# Altium PCB Copy of PCB.PcbDoc (part 3 of 3)
Units mil, origin at the board's own origin, x right, y up, seen from the top; angles counter-clockwise.
Board outline 5610.24 x 866.55 mil, 2 copper layers (Top Layer, Bottom Layer), stack 62.17 mil thick; 160 components, 90 nets, 485 pads, 247 vias.
Unrouted connection lines stored in the file: 5.
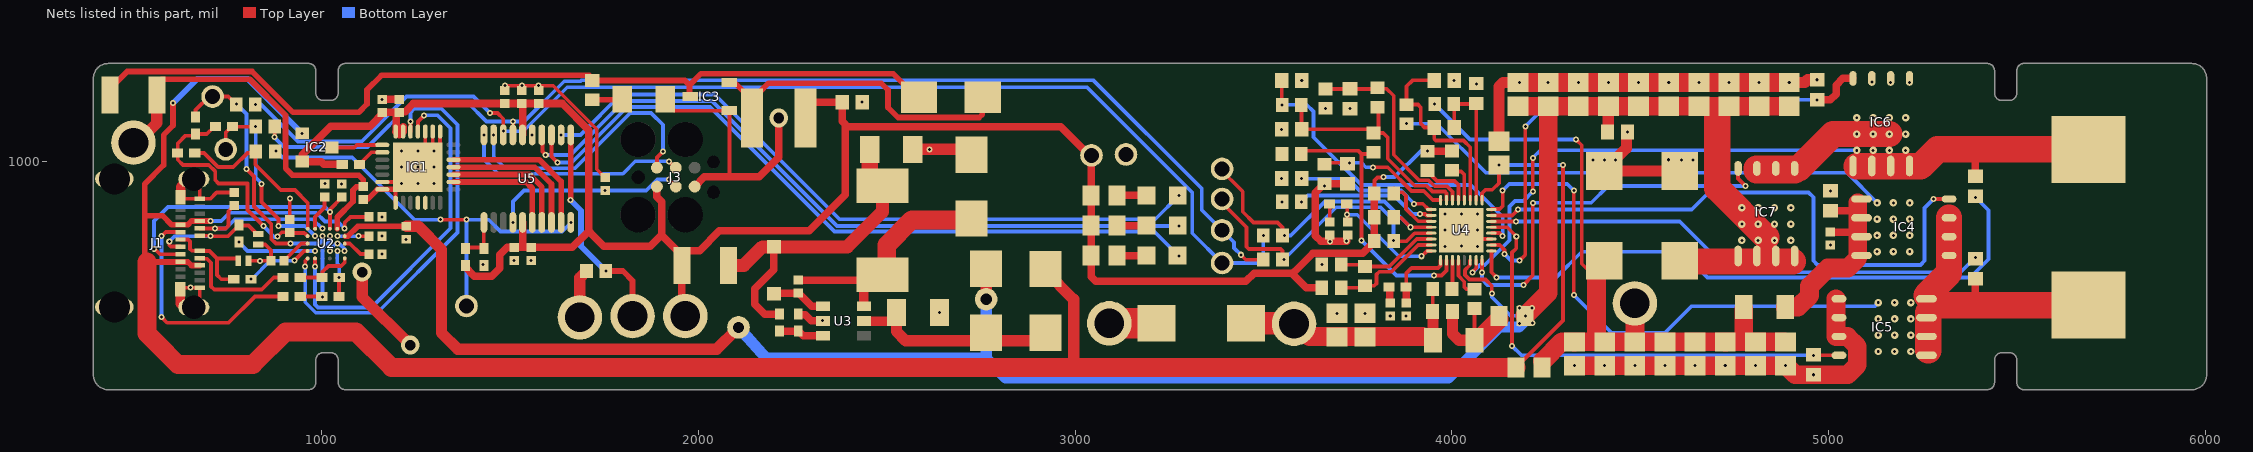
[diagram p2: the nets of this part, all layers, seen from the top]

## Part data (continued)
R60: library part RK73H1JTTD3003F, "RES 300K OHM 1% 1/10W 0603", Device Package="0603 (1608 Metric)", manufacturer="KOA Speer Electronics, Inc.", Operating Temperature="-55°C ~ 155°C", Power (Watts)="0.1W, 1/10W", Ratings=AEC-Q200, Supplier Device Package=0603, Supplier Part Number 1=2019-RK73H1JTTD3003FCT-ND, Temperature Coefficient=±100ppm/°C, Tolerance=±1%, componentlink1description=Datasheet, componentlink1url=http://www.koaspeer.com/catimages/Products/RK73H/RK73H.pdf, componentlink2description="DigiKey Link", componentlink2url=https://www.digikey.com/en/products/detail/koa-speer-electronics-inc/RK73H1JTTD3003F/9845048, Composition="Thick Film", Features="Automotive AEC-Q200, Moisture Resistant", Height - Seated (Max)="0.022\" (0.55mm)", lastupdated="14/08/2022 9:31:24 PM", Lifecycle Status=Active, Minimum Order=1, Number of Terminations=2, Package / Case="0603 (1608 Metric)", packaging=CutTape, partid=6158, Part Number=RK73H1JTTD3003F, Part Status=Active, price=0.01, Resistance="300 kOhms", series=RK73H, Size / Dimension="0.063\" L x 0.031\" W (1.60mm x 0.80mm)", Supplier 1=DigiKey
R61: library part RK73H1JTTD2004F, "RES 2M OHM 1% 1/10W 0603", Device Package="0603 (1608 Metric)", manufacturer="KOA Speer Electronics, Inc.", Operating Temperature="-55°C ~ 155°C", Power (Watts)="0.1W, 1/10W", Ratings=AEC-Q200, Supplier Device Package=0603, Supplier Part Number 1=2019-RK73H1JTTD2004FCT-ND, Temperature Coefficient=±200ppm/°C, Tolerance=±1%, componentlink1description=Datasheet, componentlink1url=http://www.koaspeer.com/catimages/Products/RK73H/RK73H.pdf, componentlink2description="DigiKey Link", componentlink2url=https://www.digikey.com/en/products/detail/koa-speer-electronics-inc/RK73H1JTTD2004F/9845151, Composition="Thick Film", Features="Automotive AEC-Q200, Moisture Resistant", Height - Seated (Max)="0.022\" (0.55mm)", lastupdated="14/08/2022 9:31:24 PM", Lifecycle Status=Active, Minimum Order=1, Number of Terminations=2, Package / Case="0603 (1608 Metric)", packaging=CutTape, partid=6175, Part Number=RK73H1JTTD2004F, Part Status=Active, price=0.01, Resistance="2 MOhms", series=RK73H, Size / Dimension="0.063\" L x 0.031\" W (1.60mm x 0.80mm)", Supplier 1=DigiKey
R63 R70 R71: library part ERJ-3EKF10R0V, "RES SMD 10 OHM 1% 1/10W 0603", Device Package="0603 (1608 Metric)", manufacturer="Panasonic Electronic Components", Operating Temperature="-55°C ~ 155°C", Power (Watts)="0.1W, 1/10W", Ratings=AEC-Q200, Supplier Device Package=0603, Supplier Part Number 1=P10.0HCT-ND, Temperature Coefficient=±100ppm/°C, Tolerance=±1%, componentlink1description=Datasheet, componentlink1url=https://industrial.panasonic.com/cdbs/www-data/pdf/RDA0000/AOA0000C304.pdf, componentlink2description="DigiKey Link", componentlink2url=https://www.digikey.com/en/products/detail/panasonic-electronic-components/ERJ-3EKF10R0V/196065, Composition="Thick Film", Features="Automotive AEC-Q200", Height - Seated (Max)="0.022\" (0.55mm)", lastupdated="14/08/2022 9:31:25 PM", Lifecycle Status=Active, Minimum Order=1, Number of Terminations=2, Package / Case="0603 (1608 Metric)", packaging=TapeAndReel, partid=5647, Part Number=ERJ-3EKF10R0V, Part Status=Active, price=0.01, Resistance="10 Ohms", series=ERJ-3EK, Size / Dimension="0.063\" L x 0.031\" W (1.60mm x 0.80mm)", Supplier 1=DigiKey
R64: library part RK73H1JTTD3833F, "RES 383K OHM 1% 1/10W 0603", Device Package="0603 (1608 Metric)", manufacturer="KOA Speer Electronics, Inc.", Operating Temperature="-55°C ~ 155°C", Power (Watts)="0.1W, 1/10W", Ratings=AEC-Q200, Supplier Device Package=0603, Supplier Part Number 1=2019-RK73H1JTTD3833FCT-ND, Temperature Coefficient=±100ppm/°C, Tolerance=±1%, componentlink1description=Datasheet, componentlink1url=http://www.koaspeer.com/catimages/Products/RK73H/RK73H.pdf, componentlink2description="DigiKey Link", componentlink2url=https://www.digikey.com/en/products/detail/koa-speer-electronics-inc/RK73H1JTTD3833F/9845250, Composition="Thick Film", Features="Automotive AEC-Q200, Moisture Resistant", Height - Seated (Max)="0.022\" (0.55mm)", lastupdated="14/08/2022 9:31:18 PM", Lifecycle Status=Active, Minimum Order=1, Number of Terminations=2, Package / Case="0603 (1608 Metric)", packaging=CutTape, partid=8746, Part Number=RK73H1JTTD3833F, Part Status=Active, price=0.01, Resistance="383 kOhms", series=RK73H, Size / Dimension="0.063\" L x 0.031\" W (1.60mm x 0.80mm)", Supplier 1=DigiKey
R65: library part AC0603FR-0730K1L, "RES SMD 30.1K OHM 1% 1/10W 0603", Device Package="0603 (1608 Metric)", manufacturer=Yageo, Operating Temperature="-55°C ~ 155°C", Power (Watts)="0.1W, 1/10W", Ratings=AEC-Q200, Supplier Device Package=0603, Supplier Part Number 1=YAG5332CT-ND, Temperature Coefficient=±100ppm/°C, Tolerance=±1%, componentlink1description=Datasheet, componentlink1url=https://www.yageo.com/upload/media/product/productsearch/datasheet/rchip/PYu-AC_51_RoHS_L_7.pdf, componentlink2description="DigiKey Link", componentlink2url=https://www.digikey.com/en/products/detail/yageo/AC0603FR-0730K1L/5896023, Composition="Thick Film", Features="Automotive AEC-Q200, Moisture Resistant", Height - Seated (Max)="0.022\" (0.55mm)", lastupdated="14/08/2022 9:31:19 PM", Lifecycle Status=Active, Minimum Order=1, Number of Terminations=2, Package / Case="0603 (1608 Metric)", packaging=CutTape, partid=8360, Part Number=AC0603FR-0730K1L, Part Status=Active, price=0.01, Resistance="30.1 kOhms", series=AC, Size / Dimension="0.063\" L x 0.031\" W (1.60mm x 0.80mm)", Supplier 1=DigiKey
R66: library part RC0603FR-07191KL, "RES 191K OHM 1% 1/10W 0603", Device Package="0603 (1608 Metric)", manufacturer=Yageo, Operating Temperature="-55°C ~ 155°C", Power (Watts)="0.1W, 1/10W", Supplier Device Package=0603, Supplier Part Number 1=311-191KHRCT-ND, Temperature Coefficient=±100ppm/°C, Tolerance=±1%, componentlink1description=Datasheet, componentlink1url=https://www.yageo.com/upload/media/product/productsearch/datasheet/rchip/PYu-RC_Group_51_RoHS_L_10.pdf, componentlink2description="DigiKey Link", componentlink2url=https://www.digikey.com/en/products/detail/yageo/RC0603FR-07191KL/727005, Composition="Thick Film", Features="Moisture Resistant", Height - Seated (Max)="0.022\" (0.55mm)", lastupdated="14/08/2022 9:31:20 PM", Lifecycle Status=Active, Minimum Order=1, Number of Terminations=2, Package / Case="0603 (1608 Metric)", packaging=CutTape, partid=7764, Part Number=RC0603FR-07191KL, Part Status=Active, price=0.01, Resistance="191 kOhms", series=RC_L, Size / Dimension="0.063\" L x 0.031\" W (1.60mm x 0.80mm)", Supplier 1=DigiKey
R67: library part RMCF0603JT220K, "RES 220K OHM 5% 1/10W 0603", Device Package="0603 (1608 Metric)", manufacturer="Stackpole Electronics Inc", Operating Temperature="-55°C ~ 155°C", Power (Watts)="0.1W, 1/10W", Ratings=AEC-Q200, Supplier Device Package=0603, Supplier Part Number 1=RMCF0603JT220KCT-ND, Temperature Coefficient=±200ppm/°C, Tolerance=±5%, componentlink1description=Datasheet, componentlink1url=https://www.seielect.com/catalog/sei-rmcf_rmcp.pdf, componentlink2description="DigiKey Link", componentlink2url=https://www.digikey.com/en/products/detail/stackpole-electronics-inc/RMCF0603JT220K/1758071, Composition="Thick Film", Features="Automotive AEC-Q200", Height - Seated (Max)="0.022\" (0.55mm)", lastupdated="14/08/2022 9:31:25 PM", Lifecycle Status=Active, Minimum Order=1, Number of Terminations=2, Package / Case="0603 (1608 Metric)", packaging=CutTape, partid=5861, Part Number=RMCF0603JT220K, Part Status=Active, price=0.01, Resistance="220 kOhms", series=RMCF, Size / Dimension="0.061\" L x 0.031\" W (1.55mm x 0.80mm)", Supplier 1=DigiKey
R68 R72: library part CRCW08050000Z0EAHP, "RES SMD 0 OHM JUMPER 1/2W 0805", Device Package="0805 (2012 Metric)", manufacturer="Vishay Dale", Operating Temperature="-55°C ~ 155°C", Power (Watts)="0.5W, 1/2W", Ratings=AEC-Q200, Supplier Device Package=0805, Supplier Part Number 1=541-0.0TBCT-ND, Tolerance=Jumper, componentlink1description=Datasheet, componentlink1url=http://www.vishay.com/docs/20043/crcwhpe3.pdf, componentlink2description="DigiKey Link", componentlink2url=https://www.digikey.com/en/products/detail/vishay-dale/CRCW08050000Z0EAHP/2222316, Composition="Thick Film", Features="Automotive AEC-Q200, Pulse Withstanding", Height - Seated (Max)="0.020\" (0.50mm)", lastupdated="14/08/2022 9:45:08 PM", Lifecycle Status=Active, Minimum Order=1, Number of Terminations=2, Package / Case="0805 (2012 Metric)", packaging=TapeAndReel, partid=28039, Part Number=CRCW08050000Z0EAHP, Part Status=Active, price=0.02, Resistance="0 Ohms", series=CRCW-HP, Size / Dimension="0.079\" L x 0.049\" W (2.00mm x 1.25mm)", Supplier 1=DigiKey
R69 R73: library part PMR18EZPJU5L0, "RES 0.005 OHM 5% 1W 1206", Device Package="1206 (3216 Metric)", manufacturer="Rohm Semiconductor", Operating Temperature="-55°C ~ 155°C", Power (Watts)=1W, Ratings=AEC-Q200, Supplier Device Package=1206, Supplier Part Number 1=RHM.005AMCT-ND, Temperature Coefficient=±100ppm/°C, Tolerance=±5%, componentlink1description=Datasheet, componentlink1url=https://www.rohm.com/datasheet/PMR18EZPFV/pmr-e, componentlink2description="DigiKey Link", componentlink2url=https://www.digikey.com/en/products/detail/rohm-semiconductor/PMR18EZPJU5L0/2094212, Composition="Metal Element", Features="Automotive AEC-Q200, Current Sense", Height - Seated (Max)="0.017\" (0.43mm)", lastupdated="14/08/2022 9:38:16 PM", Lifecycle Status=Active, Minimum Order=1, Number of Terminations=2, Package / Case="1206 (3216 Metric)", packaging=TapeAndReel, partid=27011, Part Number=PMR18EZPJU5L0, Part Status=Active, price=0.11, Resistance="5 mOhms", series=PMR, Size / Dimension="0.126\" L x 0.063\" W (3.20mm x 1.60mm)", Supplier 1=DigiKey
R74 R75: library part RC0603FR-074R99L, "RES 4.99 OHM 1% 1/10W 0603", Device Package="0603 (1608 Metric)", manufacturer=Yageo, Operating Temperature="-55°C ~ 155°C", Power (Watts)="0.1W, 1/10W", Supplier Device Package=0603, Supplier Part Number 1=311-4.99HRCT-ND, Temperature Coefficient=±200ppm/°C, Tolerance=±1%, componentlink1description=Datasheet, componentlink1url=https://www.yageo.com/upload/media/product/productsearch/datasheet/rchip/PYu-RC_Group_51_RoHS_L_10.pdf, componentlink2description="DigiKey Link", componentlink2url=https://www.digikey.com/en/products/detail/yageo/RC0603FR-074R99L/727218, Composition="Thick Film", Features="Moisture Resistant", Height - Seated (Max)="0.022\" (0.55mm)", lastupdated="14/08/2022 9:31:08 PM", Lifecycle Status=Active, Minimum Order=1, Number of Terminations=2, Package / Case="0603 (1608 Metric)", packaging=TapeAndReel, partid=12919, Part Number=RC0603FR-074R99L, Part Status=Active, price=0.01, Resistance="4.99 Ohms", series=RC_L, Size / Dimension="0.063\" L x 0.031\" W (1.60mm x 0.80mm)", Supplier 1=DigiKey
U2: "Standalone USB Type-C and USB Power Delivery Controller"
U3: "RICHTEK 1.2A, 24V, 700kHz Step-Down Converter SOT23-6"
U4: "I2C 1- to 5-Cell Buck-Boost Battery Charge Controller with USB-C PD 3.0 OTG Output"
U5: "Value-line Arm-based 32-bit MCU with up to 256 KB Flash, timers, ADC, communication interfaces, 2.4-3.6 V operation - TSSOP20 20-pin"

## Free pads (board coordinates)
  round 60 hole 30: 2(2106.3,559.06) 2(2763.78,633.86)

## Via types
v1: diameter 16, hole 8, Top Layer to Bottom Layer, tented bottom, 156 vias
v2: diameter 19.68, hole 7.87, Top Layer to Bottom Layer, tented top, 48 vias
v3: diameter 16, hole 8, Top Layer to Bottom Layer, tented both sides, 30 vias
v4: diameter 19.68, hole 7.87, Top Layer to Bottom Layer, 10 vias
v5: diameter 50, hole 28, Top Layer to Bottom Layer, tented both sides, 3 vias

## Nets (pads, with @x,y where several pads share a name; then routed paths per layer and width w, separated by ;. In a path a pad name is that pad's centre, name@x,y a point inside that pad or via, vN(x,y) a via of type N, cw(c..) or ccw(c..) an arc to the next point about the centre after c; other vN are vias at no path point)
+3V3: C14.2 C24.2 C25.2 C26.2 C27.2 C28.2 C29.2 C30.2 IC1.6 IC1.7 IC2.2 J3.1 J4.1 J12.1 L2.1 R24.1 R25.2 R26.2 R27.2 R30.1 R42.2 R50.2 R51.2 R52.2 R53.2 R54.2 R62.1 U5.5 U5.16 | length 5570
  Top Layer w10: R54.2@3794.41,915 3794.41,948.82 3802.55,956.96 3817.75,956.96 v1(3818.9,958.11)
  Top Layer w20: R30.1@1054.36,992 1005.23,992 998,999.23 948,999.23 948,1017 1024,1093 1128,1093 1164.88,1129.88 C25.2@1204.25,1129.88 ; IC1.7@1195.98,1079.01 1197.76,1080.79 1197.76,1123.39 C25.2@1204.25,1129.88 ; 1205.04,1070.87 1205.04,1079.01 ; IC1.6@1215.67,1079.01 IC1.6@1215.67,1091.32 ; R24.1@1379.09,720.91 1405,695 1451,695 1472.44,716.44 1472.44,751.97 1491.81,771.34 C30.2@1510.75,771.34 1511.04,771.63 1532.95,771.63 ; U5.5@1532.95,837.87 1532.95,771.63 ; U5.16@1532.95,1070.16 C27.2@1532.95,1152 ; 1712.6,811.02 1748.86,774.76 1872.13,774.76 1903.01,805.65 ; J3.1@1889.76,933.11 1889.76,906.14 1903.01,892.89 1903.01,805.65 ; J4.1@1965,589.21 1956,598.21 R42.2@1956,723.78 R42.2@1956,750.35 ; L2.1@2298.34,1157 C14.2@2381.43,1157 2381.43,1106.85 2389.76,1098.52 2389.76,1086.61 2389.81,1086.57 2389.81,910.81 2294.24,815.24 2055.24,815.24 2002.99,762.99 1968.64,762.99 R42.2@1956,750.35 ; 2396.82,1092.24 2961.88,1092.24 3043.31,1010.81 3043.31,909.61 3043.31,829.53 3043.31,749.53 3043.31,693.04 3055.11,681.24 3453.36,681.24 3475.43,703.31 3574.69,703.31 3613.73,664.27 R62.1@3654.41,664.27 ; 3581.2,706.2 3631.42,756.42 3763.99,756.42 R52.2@3782.55,774.97 ; R52.2@3794.41,788.11 R53.2@3794.41,851.48 R54.2@3794.41,915 ; R50.2@3935.52,1026.81 3935.82,1027.1 4000.22,1027.1 R51.2@4000.52,1027.4 ; C25.2@1204.25,1129.88 C25.2@1205.04,1129.88 1206.85,1131.69 1221.21,1131.69 1243.06,1153.54 1485.47,1153.54 1532.95,1153.54 1575.47,1153.54 1637.75,1153.54 1708.66,1082.64 1708.66,814.96 1665.04,771.34 C29.2@1555.75,771.34 1533.25,771.34 1532.95,771.63 ; 1903.01,805.65 1903.01,803.34 R42.2@1956,750.35
  Bottom Layer w10: v1(3818.9,958.11) 3848.11,958.11 3917.83,1027.83 v1(3935,1027.83)
+5V0: C13.2 J2.1 R20.2 U2.A5 | length 1078.1
  Top Layer w15: J2.1@500,1049.56 J2.1@509.56,1049.56 ; R20.2@562.01,1150 R20.2@562.01,1172 ; R20.2@565,1188 565,1208.58 574.42,1218 808.55,1218 903.8,1122.75 903.8,1049.99 904.22,1049.56 904.22,980.78 921.61,963.39 1097.61,963.39 1110.24,950.76 C13.2@1110.24,933.66 ; U2.A5@1041.1,821.06 1041.1,851.53 1082.68,893.11 1082.68,923.34 1091.86,932.53 C13.2@1103.35,932.53
  Top Layer w30: J2.1@509.56,1049.56 562.01,1102.01 R20.2@562.01,1150
GND: C8.1 C9.1 C10.1 C11.1 C12.1 C13.1 C14.1 C15.1 C16.2 C18.1 C19.2 C24.1 C25.1 C26.1 C27.1 C28.1 C29.1 C30.1 C31.1 C32.1 C33.1 C34.1 C35.1 C36.1 C37.1 C38.1 C39.1 C40.1 C41.1 C42.1 C43.1 C44.1 C45.1 C46.2 C47.1 C49.1 C50.1 C51.1 C52.1 C53.1 C54.1 C55.1 C56.1 C57.2 C58.1 C59.1 C63.1 C64.1 C65.1 C66.1 C67.1 C68.1 C69.1 C70.1 C71.1 C72.1 C73.1 C74.1 C75.1 C76.1 C77.1 C78.2 D3.2 D4.1 D8.2 IC1.1 IC1.2 IC1.3 IC1.13 IC1.14 IC1.15 IC1.29 IC3.1 IC5.1 IC5.2 IC5.3 IC6.1 IC6.2 IC6.3 J1.A1 J1.A12 J1.B1 J1.B12 J1.S J3.5 J5.1 J15.1 J18.1 R21.1 R28.1 R29.1 R58.2 R60.2 R65.1 R66.1 R67.1 U2.C5 U2.D4 U2.D6 U3.2 U4.27 U4.33 U5.15 | length 5845.5
  Top Layer w10: J1.B1@624.61,660.54 628.54,664.47 J1.A12@676.18,664.47 676.18,612.5 J1.S@660.04,612.5 ; J1.B12@625,904.63 628.94,900.69 J1.A1@676.18,900.69 ; J1.S@660.04,952.66 676.18,952.66 J1.A1@676.18,900.69 ; C32.1@767.33,916.96 720.79,916.96 704.53,900.69 J1.A1@676.18,900.69 ; D3.2@805.78,736 v3(835.41,736) 865.04,736 C11.1@865.04,736.34 865.04,763.96 849.74,779.26 D8.2@831,779.26 ; C12.1@910,850.32 C12.1@915,845.32 v1(915,901.34) ; C10.1@1007.36,940.08 v1(1007.87,940.59) ; C8.1@1158.35,755 v1(1159.69,753.66) ; v1(1159.69,801.38) C9.1@1159.78,801.28 ; IC1.13@1160.55,945.16 1207.8,945.16 v4(1211.73,941.22) 1195.98,925.47 IC1.15@1195.98,890.04 ; v4(1255.04,984.53) IC1.29@1274.72,1004.21 ; IC1.3@1274.72,1079.01 IC1.29@1274.72,1004.21 ; IC1.2@1294.41,1079.01 IC1.29@1294.41,1023.9 ; IC1.1@1314.09,1079.01 1314.09,1043.58 v4(1298.35,1027.83) IC1.29@1294.41,1023.9 ; v1(1486.83,1200.79) v1(1531.5,1200.79) v1(1574.8,1200.79) 1614.55,1200.79 1730,1085.34 1730,979.05 C31.1@1751.97,957.09 ; C16.2@1912.09,1168 C16.2@1912.09,1165 1912.09,1159.16 1936.65,1134.6 IC3.1@2082.17,1134.6 2082.17,959.83 2083,959 ; 2213,1087.17 v5(2213,1115) ; U4.33@4006.43,817.13 4006.43,809.32 4017.47,798.28 4025.28,798.28 4030.06,793.5 U4.27@4105,793.5 ; IC1.29@1274.72,1004.21 IC1.29@1294.41,1023.9
  Top Layer w15: C13.1@1110.24,899.01 1121.01,899.01 1147.47,925.47 IC1.14@1160.55,925.47 IC1.29@1195.98,925.47
  Top Layer w20: v1(1160.04,1164.53) C25.1@1205.04,1164.53 ; J3.5@1989.76,933.11 2015.66,959 2083,959 2161,959 2213,1011 2213,1087.17 ; R21.1@2265,595.16 2265,592.2 2283.58,592.2 2298.79,577 v1(2329,577) ; v1(3661.42,934.49) 3661.12,934.49 3658.6,937.01 R66.1@3661.59,940 ; v1(3720.47,788.11) 3677.88,788.11 v1(3677.17,787.4) 3652.66,787.4 3637.8,802.27 3637.8,917.03 R66.1@3661.59,940.83 3661.79,940.63 3723.19,940.63 C42.1@3723.39,940.43
  Top Layer w25: J1.B1@624.61,660.54 624.61,621.9 634,612.5 J1.S@660.04,612.5 ; J1.B12@625,904.63 625,932.35 645.31,952.66 J1.S@660.04,952.66
  Top Layer w30: v5@1112.75,706.17 1112.57,706 v5(1107,706) 1107,640 v5(1235,512) ; J15.1@1685.04,612.2 1685.04,690.94 R29.1@1702.76,708.66 ; C19.2@2568.9,1031.5 2569.09,1031.69 v1(2613,1031.69) 2710.43,1031.69 D4.1@2724.41,1017.72 ; C47.1@4125,1052.99 4125,1198.3 4135.74,1209.04 C77.1@4175.91,1209.04 ; v1(4466.57,1077.52) 4463.86,1074.8 4463.86,1034.92 4405,976.06 C57.2@4405,974.09 C78.2@4605,974.09 ; v1(4895.8,1209.15) 4937.31,1209.15 4944.74,1216.57 v1(4970,1216.57)
  Top Layer w50: C77.1@4175.91,1209.04 4176.01,1209.15 v1(4180,1209.15) v1(4895.8,1209.15) C68.1@4895.91,1209.25 C68.1@4896.5,1209.84 ; v1(4325.91,457.46) v1(4405.91,457.46) v1(4485.91,457.46) v1(4565.91,457.46) v1(4645.91,457.46) v1(4725.91,457.46) v1(4805.91,457.46) v1(4885.91,457.46) 4887.87,457.46 4911.91,433.43 v1(4960,433.43) 5050.97,433.43 5076.48,458.94 5076.48,508.52 5050.08,534.92 5020,534.92 IC5.1@5020,635
  Top Layer w80: J18.1@3090.55,570 C46.2@3215.55,570
  Bottom Layer w10: v1(1021.42,762.01) 1022.57,763.15 1022.57,767.2 1035.91,780.54 1039.95,780.54 v1(1041.1,781.69) ; v1@1046.02,781.69 1060.79,766.93 v1(1060.79,762.01)
  other v1: 3836.54,589.21 3878.38,589.21 3695,596.5 3769.41,596.5 2639.76,598.43 652,665 1427.91,725.98 3655,725.72 1510.75,736.69 1555.75,736.69 5004.77,777.68 1224,792 1159.69,852.49 3549.41,892.6 5005,921.57 1052.36,940.08 3548.43,954.25 4375,1003.54 4405.91,1003.54 4435,1003.54 4575,1004.21 4610,1003.54 4640,1003.54 1558.54,1070.16 3548.43,1085 3730,1139.8 3665,1140.78 2434.57,1157 4065,1205 4255.91,1209.04 4335.91,1209.04 4415.91,1209.04 4495.91,1209.04 4575.91,1209.04 4655.91,1209.25 4735.91,1209.25 4815.91,1209.25 5115,1210 5165,1209.84 5215,1209.84 3601.57,1215 4006.25,1215.01
  other v4: 4025.28,817.13 1255.04,941.22 1298.35,941.22 1211.73,984.53 1298.35,984.53 1211.73,1027.83 1255.04,1027.83
NetC8_2: C8.2 U2.C6 | length 75.9
  Top Layer w10: U2.C6@1060.79,781.69 1074.33,781.69 1102.36,753.66 C8.2@1125.04,753.66
NetC9_2: C9.2 U2.B5 | length 85.8
  Top Layer w10: v3(1097.36,801.38) C9.2@1125.04,801.38
  Bottom Layer w10: v1(1041.1,801.38) v3(1097.36,801.38) v3@1096.05,802.69
NetC10_2: C10.2 U2.A2 | length 90.5
  Top Layer w10: U2.A2@982.06,821.08 982.06,852.14 1007.36,877.44 C10.2@1007.36,901.06
NetC11_2: C11.2 U2.C1 | length 81.3
  Top Layer w10: C11.2@899.93,736.09 945.54,781.69 U2.C1@962.36,781.69
NetC12_2: C12.2 R11.1 R12.1 R13.2 U2.B1 | length 649.3
  Top Layer w10: R11.1@717.36,1092 714.41,1092 694.77,1072.36 R12.1@665,1072.36 660.83,1068.19 638.19,1068.19 617.36,1047.36 R13.2@617.36,1022.42 617.36,1004.21 631.57,990 700,990 717.36,972.64 717.36,950 725.98,941.39 802.55,941.39 802.55,870.56 v3(845,828.11) ; v3(882.95,800.87) 893.74,811.66 C12.2@915,811.66 ; C12.2@915,810 953.46,810 956.51,806.94 956.73,806.94 962.3,801.38 U2.B1@962.36,801.38
  Bottom Layer w10: v3(845,828.11) 873.9,799.21 v3@877.95,799.21
NetC15_2: C15.2 D9.2 D10.2 U3.5 | length 560
  Top Layer w10: C15.2@2505,576 2525.59,596.59 C15.2@2525.59,598.43 ; D10.2@2899.88,523.62 D10.2@2921.26,545
  Top Layer w25: U3.5@2439.13,576 C15.2@2505,576
  Top Layer w30: C15.2@2525.59,596.59 2525.59,547.99 2549.96,523.62 D10.2@2899.88,523.62
NetC16_1: C16.1 R18.1 | length 82.2
  Top Layer w15: R18.1@1718,1163.41 1792.32,1163.41 C16.1@1797.91,1169
NetC17_1: C17.1 D4.2 L1.1 U3.6 | length 649.1
  Top Layer w20: C17.1@2265,684.84 L1.1@2457.83,684.84 ; L1.1@2443,670 L1.1@2457.83,684.84 ; L1.1@2500,703.31 2476.3,703.31 L1.1@2457.83,684.84
  Top Layer w25: U3.6@2435.12,614.94 U3.6@2435.12,615.37 ; U3.6@2439.13,615.37 2439.13,670 L1.1@2443,670
  Top Layer w50: L1.1@2500,703.31 2500,777.76 2566.73,844.49 D4.2@2724.41,844.49
NetC17_2: C17.2 D2.2 U3.1 | length 145.9
  Top Layer w20: D2.2@2200,648.78 2200.71,649.49 2264.29,649.49 C17.2@2265,650.2 2265.79,650.2 2300.61,615.37 U3.1@2330.87,615.37
NetC18_2: C18.2 R55.2 U4.16 | length 342.7
  Top Layer w10: R55.2@3721.03,886.97 3722.21,885.79 v1(3722.21,858.27) ; C18.2@3723.39,838.97 C18.2@3722.8,839.56 ; v1(3920,748.03) 3933.98,762.01 U4.16@3945.55,762.01 ; v1(3722.21,858.27) 3722.21,840.15 C18.2@3722.8,839.56 ; v1(3722.21,858.27) 3722.8,857.68 C18.2@3722.8,839.56
  Bottom Layer w10: v1(3722.21,858.27) 3748.9,858.27 3859.13,748.03 v1(3920,748.03)
NetC19_1: C19.1 D2.1 L1.2 R19.2 R42.1 | length 895
  Top Layer w10: L1.2@2454.72,968.7 L1.2@2488.19,935.24
  Top Layer w20: D2.1@2200,772.79 2200,712 2150,662 2150,620.79 2176.38,594.41 R19.2@2215,594.41
  Top Layer w35: R42.1@2080.02,723.78 2120.78,723.78 2169.79,772.79 D2.1@2200,772.79 2394.84,772.79 2488.19,866.14 L1.2@2488.19,935.24
  Top Layer w45: L1.2@2454.72,968.7 C19.1@2454.72,1031.5
NetC31_2: C31.2 J3.3 U5.4 | length 519.6
  Top Layer w10: v3(1921.26,951.57) J3.3@1939.74,933.11
  Bottom Layer w10: v1(1507.36,837.87) 1507.36,893.19 1536.61,922.44 v3(1751.97,922.44) ; v3@1751.97,922.32 1861.24,922.32 1890.49,951.57 v3(1921.26,951.57)
NetC32_2: C32.2 J1.A5 U2.A3 | length 444.7
  Top Layer w10: J1.A5@676.18,821.95 v3(716.47,821.95) 744.92,821.95 752.36,829.39 752.36,867.28 C32.2@767.36,882.28
  Bottom Layer w10: v3@715.83,820.87 v3@716.07,821.1 ; v3(716.47,821.95) 744.92,821.95 769.33,846.35 976.01,846.32 1001.5,820.83 v1(1001.73,821.06)
NetC33_2: C33.2 J1.B5 U2.A4 | length 733.9
  Top Layer w10: v3(555,767.43) 556.62,767.43 570.99,753.06 J1.B5@625,753.06 ; U2.A4@1021.42,821.06 v3(1021.42,866.06) 1021.42,872.44 C33.2@1052.36,903.38
  Bottom Layer w10: v3@554.36,766.34 554.36,841.34 591.72,878.7 1008.78,878.7 v3(1021.42,866.06)
NetC34_2: C34.2 C67.2 C68.2 C69.2 C70.2 C71.2 C72.2 C73.2 C74.2 C75.2 C76.2 C77.2 C78.1 D9.1 IC7.5 IC7.6 IC7.7 IC7.8 pad.2 R68.1 U2.B6 U4.22 | length 6123.2
  Top Layer w10: U4.22@4048.9,737.4 4047.83,736.34 4047.83,723.95 4035,711.11 4035,698.22 4046.9,686.32 4089.35,686.32 4106.06,669.61 v1(4106.06,648.78) ; R68.1@4194.45,590 R68.1@4194.45,593.94
  Top Layer w15: U2.B6@1062,801.38 1069.38,801.38 1095.28,827.28 C34.2@1224.41,827.28
  Top Layer w30: C34.2@1225,828 1256,828 1318,766 1318,544.2 1361.2,501 2048.24,501 pad.2@2102.36,555.12 ; pad.2@2763.78,633.86 D9.1@2763.78,714.57 ; C67.2@4415,1079.57 4415.45,1080.02 4415.45,1145.6 C74.2@4415.91,1146.05
  Top Layer w50: C77.2@4175.91,1146.05 4176.01,1146.15 4895.8,1146.15 C68.2@4895.91,1146.26 ; R68.1@4194.45,590 v1(4195.24,590) 4255.91,650.67 C76.2@4255.91,1146.05
  Top Layer w70: C78.1@4605,734.02 IC7.8@4905,734.02 ; 4705,1129.01 4705,928.28 4835,798.28
  Bottom Layer w10: v1(4106.06,648.78) 4106.06,639.66 4155.72,590 v1(4195.24,590)
  Bottom Layer w30: pad.2@2106.3,559.06 2180.35,477.13 2763.78,477.13 ; pad.2@2763.78,633.86 2763.78,477.13 ; v1(4195.24,590) 4195.24,577.57 4177.66,560 4126.35,560 3991.35,425 2815.91,425 2763.78,477.13
  other v1: 4180,570 4214,571 4180,610 4213,611
  other v2: 4770.04,790.2 4813.35,790.2 4856.65,790.2 4899.96,790.2 4770.04,833.5 4813.35,833.5 4856.65,833.5 4899.96,833.5 4770.04,876.81 4813.35,876.81 4856.65,876.81 4899.96,876.81
NetC35_2: C35.2 C47.2 D10.1 IC2.1 J1.A4 J1.A9 J1.B4 J1.B9 R72.1 U2.A6 U4.1 | length 6773.5
  Top Layer w10: v1(1060.79,821.06) v1(1060.79,821.06) 1060.83,837.41 1075.91,852.49 C35.2@1125.04,852.49 ; U4.1@4080.39,896.85 4080.39,915.39 4089.34,924.34 4107.43,924.34 4125,941.91 v1(4125,990) ; R72.1@4170.55,452.63 4295,577.08 v1(4295,990)
  Top Layer w15: v1(604.97,1154.98) 604.97,1094.97 580,1070 580,990 530,940 530,855.76 ; J1.B4@625,733.37 J1.B4@624.53,732.9 ; J1.A9@676.18,723.53 653.9,723.53 644.53,732.9 J1.B4@624.53,732.9 ; v3(704.53,841.64) J1.A4@676.18,841.64 654.21,841.64 644.37,831.8 J1.B9@625,831.8 600.93,831.8 576.97,855.76 530,855.76 ; 530,855.76 530,738.53 535.63,732.9 J1.B4@624.53,732.9
  Top Layer w30: D10.1@2921.26,708.39 2996.06,633.58 2996.06,476.25
  Top Layer w50: 535.63,732.9 535.63,543.11 562.99,515.75 618.11,460.63 817.17,460.63 903.78,547.24 1090.55,547.24 1185.17,452.63 3019.69,452.63 R72.1@4170.55,452.63 ; D10.1@2921.26,708.39 D10.1@2921.26,714.29
  Bottom Layer w10: v3@703.89,840.27 v3@703.89,840.55 ; v3(704.53,841.64) 732.98,841.64 755.04,863.7 985,863.7 1008.43,840.27 1041.58,840.27 v1(1060.79,821.06) ; v1(4125,990) v1(4295,990)
  Bottom Layer w15: v1@604.33,1153.9 669.43,1219 803.03,1219 v1(947.63,1074.4)
NetC36_2: C36.2 R55.1 | length 48
  Top Layer w10: C36.2@3675.71,838.97 R55.1@3675.73,886.95
NetC37_2: C37.2 R56.1 | length 43.9
  Top Layer w20: R56.1@3833.46,666.54 3835,665 3835,625.39 C37.2@3836.54,623.86
NetC38_2: C38.2 R56.2 U4.17 | length 199.3
  Top Layer w10: R56.2@3883.46,671.25 R56.2@3878.74,666.54 3878.74,702.42 3893.32,717 3963.36,717 3970.16,723.8 U4.17@3970.16,737.4
  Top Layer w20: C38.2@3878.38,623.86 3878.56,624.04 3878.56,666.35 R56.2@3878.74,666.54
NetC39_2: C39.2 R63.1 U4.28 | length 896.8
  Top Layer w10: C39.2@3548.43,1215 3548.43,1150.98 v1(3549.41,1150) ; U4.28@4105.75,810 4127.27,810 v1(4135,802.27)
  Bottom Layer w10: v1(3549.41,1150) 3615,1150 3632.76,1132.24 3632.76,1064.09 3759.84,937.01 4050.43,937.01 4135,852.44 v1(4135,802.27)
NetC40_2: C40.2 R57.1 R63.2 R64.2 U4.7 | length 639.2
  Top Layer w10: R63.2@3600.59,1150 3600.59,1085.98 C40.2@3601.57,1085 3785.7,1085 R57.1@3792.59,1078.11 ; R57.1@3791.97,1075.16 3818.14,1075.16 3830,1063.3 3830,1006.78 3901.78,935 3933.16,935 3948.53,919.63 3981.71,919.63 3985.91,915.44 U4.7@3985.91,896.85 ; R64.2@3803.15,1143.7 3805.12,1143.7 R57.1@3805.12,1077.52
NetC41_2: C41.2 U4.9 | length 378.8
  Top Layer w10: v1(3900,887.17) 3922.91,887.17 3937.83,872.24 U4.9@3945.55,872.24
  Bottom Layer w10: v1(3600.59,954.06) 3723.38,954.06 3755,922.44 3864.73,922.44 v1(3900,887.17)
NetC42_2: C42.2 R66.2 U4.8 | length 366.4
  Top Layer w10: R66.2@3650.86,981.57 3665.35,996.06 v1(3728.35,996.06) ; v1(3791.34,984.25) 3829.69,984.25 3892.94,921 3925.57,921 3949.57,897 3970.01,897 U4.8@3970.16,896.85
  Bottom Layer w10: v1(3728.35,996.06) 3759.84,996.06 3771.65,984.25 v1(3791.34,984.25)
NetC43_2: C43.2 R64.1 R67.2 U4.6 | length 556.2
  Top Layer w10: R67.2@3665,1191.96 R64.1@3795,1191.96 ; R64.1@3803.15,1192.91 3826.77,1192.91 3845.59,1174.09 3845.59,1017.39 3913.09,949.89 3938.35,949.89 3954.61,933.63 3987.51,933.63 4001.65,919.49 U4.6@4001.65,896.85
NetC44_2: C44.2 C45.2 C46.1 C48.2 J17.1 R69.2 R71.2 | length 626.7
  Top Layer w10: R71.2@3949.41,660.72 3949.41,602.4 C48.2@3948.5,601.5 C48.2@3949.88,600.12
  Top Layer w30: R69.2@3949.88,525 C48.2@3949.88,600.12
  Top Layer w50: J17.1@3578.74,578.74 3622.48,535 3769.41,535 3923.32,535
  Top Layer w60: C46.1@3453.74,570 J17.1@3581.13,570
NetC48_1: C48.1 R68.2 R69.1 R70.2 | length 283.4
  Top Layer w10: R69.1@4060.48,531.79 R70.2@4060.48,609.41
  Top Layer w30: C48.1@4001.65,601.5 4001.65,542.27 4018.92,525 R69.1@4060.12,525 ; R68.2@4125.55,580.55 R68.2@4125.55,590
  Top Layer w50: R69.1@4075,530 R68.2@4125.55,580.55
NetC49_2: C49.2 C50.2 C51.2 C52.2 C53.2 C54.2 C55.2 C56.2 C57.1 J16.1 R72.2 R73.1 R74.2 | length 1819.2
  Top Layer w10: v1(4330,1057.79) 4345,1042.79 4345,727.87 4375,697.87 C57.1@4384,697.87 ; C51.2@4485.91,520.45 C51.2@4486.48,521.02 ; C56.2@4882.7,521.02 C56.2@4885.91,517.82
  Top Layer w50: R72.2@4240.84,469.73 4292.13,521.02 4323.37,521.02 4323.94,520.45 C49.2@4325.91,520.45 4325.91,521.02 4384,521.02 C57.1@4384,697.87 ; C50.2@4405,521.02 C51.2@4486.48,521.02 ; J16.1@4500,624.96 4486.48,611.44 C51.2@4486.48,521.02 ; C54.2@4725.91,520.45 4727.87,520.45 C54.2@4728.45,521.02 ; 4775,530 R73.1@4775,609.63 ; C56.2@4882.7,521.02 C54.2@4728.45,521.02 ; C51.2@4486.48,521.02 4645.91,521.02 C54.2@4728.45,521.02
  Bottom Layer w10: v1(3954.41,1152) 4048.62,1057.79 v1(4330,1057.79)
NetC58_2: C58.2 C59.2 IC4.5 IC4.6 IC4.7 IC4.8 R73.2 R75.2 | length 1899.9
  Top Layer w20: C58.2@5004.77,812.32 5075.99,812.32 5077.64,810.68 ; C59.2@5005,868.43 5056.06,868.43 5077.64,890
  Top Layer w50: R73.2@4885.12,613.29 4885.91,612.5 4918.91,612.5 4950,643.59 4950,668.68 4997.85,716.54 5051.23,716.54 5077.64,742.94 5077.64,810.68 5077.64,890
  Bottom Layer w10: v1(3880,1100) 3960,1100 4090,970 5049.09,970 v2(5129.13,889.96)
  other v2: 5129.13,760.04 5172.44,760.04 5215.75,760.04 5129.13,803.35 5172.44,803.35 5215.75,803.35 5129.13,846.65 5172.44,846.65 5215.75,846.65 5172.44,889.96 5215.75,889.96
NetC60_1: C60.1 U4.30 | length 1357.5
  Top Layer w10: U4.30@4105,840.75 4105.37,840.37 4169.63,840.37 v1(4170,840)
  Bottom Layer w10: v1(4170,840) 4605,840 4739.66,705.34 5350.34,705.34 v1(5390,745)
NetC60_2: C60.2 IC4.1 IC4.2 IC4.3 IC5.5 IC5.6 IC5.7 IC5.8 L4.1 U4.32 | length 2319.1
  Top Layer w10: U4.32@4105,872.24 4106.06,873.31 4127.3,873.31 4135,881.01 v1(4135,922.44) ; v3(4323.94,645) v3(4323.94,922.44) ; IC5.8@5252.2,635 5255.6,635 IC5.8@5260.08,639.47
  Top Layer w20: 5390,618.31 C60.2@5390,688.43
  Top Layer w70: 5265,497.8 5265,597.8 5285.51,618.31 ; IC4.3@5320.08,850 IC4.2@5320.08,800 IC4.1@5320.08,750 5320.08,703.74 5260.08,643.74 5285.51,618.31 ; L4.1@5690,618.31 5390,618.31 5285.51,618.31
  Bottom Layer w10: v1(4135,922.44) 4152.56,940 4306.38,940 v3(4323.94,922.44) ; v3(4323.94,645) 4423.94,545 4565.75,545 4635.75,615 5122.17,615 v2(5132.13,624.96)
  other v2: 5132.13,495.04 5175.43,495.04 5218.74,495.04 5132.13,538.35 5175.43,538.35 5218.74,538.35 5132.13,581.65 5175.43,581.65 5218.74,581.65 5175.43,624.96 5218.74,624.96
NetC61_1: C61.1 U4.25 | length 1638.4
  Top Layer w10: U4.25@4105,762.01 4105,705.29 v1(4118.95,691.34)
  Bottom Layer w10: v1(4118.95,691.34) 4276.34,691.34 4345.04,760.04 4609.96,760.04 4678.66,691.34 5376.34,691.34 5425,740 5425,870 v1@5390.45,904.55
  other v1: 5390,904.09
NetC61_2: C61.2 IC6.5 IC6.6 IC6.7 IC6.8 IC7.1 IC7.2 IC7.3 L4.2 U4.23 | length 2493.7
  Top Layer w10: v1(4055,705) 4055,706.62 4064.65,716.27 U4.23@4064.65,737.4 ; v1(4215,920) v1(4215,1009.45)
  Top Layer w20: C61.2@5390,961.57 5390,1031.69
  Top Layer w70: IC7.1@4910,976.22 4810,976.22 IC7.3@4810,981.14 IC7.2@4860,981.14 IC7.1@4910,981.14 4921.09,981.14 5012.39,1072.44 v2(5075.04,1072.44) v2(5118.35,1072.44) v2(5161.65,1072.44) ; 5075.04,986.62 5161.65,986.62 5215,986.62 5244.33,986.62 5289.4,1031.69 5390,1031.69 L4.2@5690,1031.69
  Bottom Layer w10: v1(4055,705) 4075,725 4087.3,725 4153,790.7 4153,880.28 4167.72,895 4190,895 v1(4215,920) ; v1(4215,1009.45) 4234.69,1029.13 v2(5075.04,1029.13)
  other v2: 5118.35,1029.13 5161.65,1029.13 5204.96,1029.13 5204.96,1072.44 5075.04,1115.75 5118.35,1115.75 5161.65,1115.75 5204.96,1115.75
NetC62_1: C62.1 C65.2 R75.1 U4.3 | length 507.8
  Top Layer w10: C65.2@3953.1,1215.01 3895.42,1215.01 3879.68,1199.27 R75.1@3879.68,1150.6 3910.45,1150.6 3917.76,1143.29 3917.76,1100.04 3927.8,1090 C62.1@3953.43,1090 ; 3953.43,1069.33 3953.43,1059.68 3958.1,1055 4031.39,1055 4048.9,1037.5 U4.3@4048.9,896.85
NetC62_2: C62.2 C64.2 R74.1 U4.2 | length 391.2
  Top Layer w10: C62.2@4006.57,1090 4006.57,1151.02 R74.1@4005.59,1152 C64.2@4064.65,1152 ; U4.2@4064.65,896.85 C64.2@4064.65,1152 ; C64.2@4074.68,1153.43 C64.2@4075,1153.11 ; C64.2@4064.65,1152 C64.2@4075,1152 ; C64.2@4075,1152 4076.11,1152 C64.2@4075,1153.11 ; C64.2@4075,1152 C64.2@4075,1153.11
NetC63_2: C63.2 IC5.4 U4.29 | length 1241.9
  Top Layer w10: U4.29@4105,825 4147.13,825 v1(4171.06,801.06) 4171.06,768.96 4160,757.9 v1(4160,510) ; v1(4960,485) IC5.4@5019.92,485
  Bottom Layer w10: v1(4160,510) 4185,485 v1(4960,485)
NetC66_2: C66.2 IC6.4 U4.26 | length 1397.3
  Top Layer w10: U4.26@4105,777.76 4127.24,777.76 4140,765 v1(4140,753.66) ; v1(4180,736.69) 4195,751.69 v1(4195,1092.24)
  Top Layer w20: v1(4970,1163.43) 5004.77,1163.43 5020,1178.66 5020,1202.36 5037.72,1220.08 IC6.4@5065,1220.08
  Bottom Layer w10: v1(4140,753.66) 4156.97,736.69 v1(4180,736.69) ; v1(4195,1092.24) 4266.18,1163.43 v1(4970,1163.43)
NetD1_1: D1.1 IC3.2 L2.2 | length 821.5
  Top Layer w10: IC3.2@2082.17,1209.4 2083.83,1207.74 IC3.2@2097.26,1207.74 ; L2.2@2146.13,1134 L2.2@2146.13,1158.87
  Top Layer w15: IC3.2@2097.26,1207.74 L2.2@2146.13,1158.87 ; L2.2@2161.21,1183.21 2185.74,1207.74 2485,1207.74 2503,1189.74 2503,1143.08 2529.9,1116.18 2745.18,1116.18 2753.65,1124.65 D1.1@2753.65,1165
NetD1_2: D1.2 IC3.3 R18.2 R20.1 | length 2362.8
  Top Layer w15: R20.1@435,1190 483.5,1238.5 814.92,1238.5 923.42,1130 1098.01,1130 1120,1151.99 1120,1190 1158.35,1228.35 1709.65,1228.35 R18.2@1718,1220 ; R18.2@1712,1214 1712.59,1214.59 R18.2@1718,1214.59 1963.41,1214.59 1976,1202 ; IC3.3@1977.83,1172 1976,1173.83 1976,1202 ; D1.2@2585.35,1170 2579.45,1170 2516.74,1232.71 2006.71,1232.71 1976,1202
NetD3_1: D3.1 J1.A7 J1.B7 R31.2 | length 284.6
  Top Layer w10: J1.B7@625,792.43 644.49,792.43 650,786.92 650,767.43 654.53,762.9 J1.A7@676.18,762.9 ; J1.A7@675.54,761.81 702.19,761.81 722,742 ; R31.2@766.36,687 733,687 722,698 722,742 ; D3.1@778.22,736 778.22,742 722,742
NetD5_1: D5.1 R25.1 | length 79.2
  Top Layer w20: R25.1@3110.51,749.53 D5.1@3189.72,749.53
NetD5_2: D5.2 U5.13 | length 1958.8
  Top Layer w10: U5.13@1609.72,1070.16 1609.72,1012.94 v3(1625.98,996.68) ; D5.2@3272.4,749.53 3273.9,748.03 v1(3275.59,748.03)
  Bottom Layer w10: v3(1625.98,996.68) 1663.49,996.68 1811.02,1144.21 2030.83,1144.21 2361.44,813.6 3210.02,813.6 v1(3275.59,748.03)
NetD6_1: D6.1 R26.1 | length 79.2
  Top Layer w20: R26.1@3110.51,829.53 D6.1@3189.72,829.53
NetD6_2: D6.2 U5.14 | length 1935
  Top Layer w10: U5.14@1584.13,1070.16 1585.61,1068.68 1585.61,1025.88 v3(1594.49,1017)
  Bottom Layer w10: v3(1594.49,1017) 1660.19,1017 1803.15,1159.96 2036.3,1159.96 2367.66,828.6 v1(3275.59,828.6)
NetD7_1: D7.1 R27.1 | length 79.2
  Top Layer w10: R27.1@3110.51,909.61 R27.1@3110.59,909.53
  Top Layer w20: R27.1@3110.59,909.53 D7.1@3189.72,909.53
NetD7_2: D7.2 U5.12 | length 1850.9
  Top Layer w10: D7.2@3272.4,909.53 3272.48,909.45 v1(3275.59,909.45)
  Bottom Layer w10: v3(1635.31,1070.16) 1686.69,1070.16 1793.7,1177.17 2043.31,1177.17 2374.02,846.46 3212.6,846.46 v1(3275.59,909.45)
NetD8_1: D8.1 J1.A6 J1.B6 R32.2 | length 337.1
  Top Layer w10: v3(595,787.43) 595,777.43 598.78,773.65 624.09,773.65 J1.B6@625,772.74 ; J1.A6@676.18,802.27 v3(705,802.27) ; v3@704.36,801.18 704.71,800.83 750.35,800.83 777.21,827.68 780.16,827.68 R32.2@780.16,829.39 ; R32.2@780.16,830.64 R32.2@780.16,829.39 ; D8.1@831,806.82 828,806.82 805.43,829.39 R32.2@780.16,829.39
  Bottom Layer w10: v3@594.36,786.34 609.2,801.18 v3@704.36,801.18
NetIC1_4: IC1.4 U2.E2 | length 972.7
  Top Layer w10: v3(982.05,721.06) U2.E2@982.05,742.32 ; IC1.4@1255.04,1079.01 1255.39,1079.36 1255.39,1105.78 v1(1271.65,1122.05)
  Bottom Layer w10: v3(982.05,721.06) 982.05,619.69 989.53,612.2 1131.83,612.2 1342,822.37 1342,1088 1307.95,1122.05 v1(1271.65,1122.05)
NetIC1_5: IC1.5 U2.E1 | length 1106.5
  Top Layer w10: v3(955.83,721.1) 955.83,735.79 U2.E1@962.36,742.32 ; IC1.5@1235.32,1079.04 v1(1235.3,1106.3)
  Bottom Layer w10: v3(955.83,721.1) 955.83,626.1 983.73,598.2 1147.42,598.2 1360,810.79 1360,1097 1316.95,1140.05 1245.59,1140.05 1235.3,1129.75 v1(1235.3,1106.3)
NetIC1_8: IC1.8 IC2.3 | length 136.9
  Top Layer w10: IC2.3@1026.37,1037 1086,1037 1092.58,1043.58 IC1.8@1160.55,1043.58
NetIC1_9: IC1.9 R30.2 | length 74.1
  Top Layer w10: R30.2@1099.64,992 1131.53,1023.9 IC1.9@1160.55,1023.9
NetIC1_18: IC1.18
NetIC1_19: IC1.19
NetIC1_23: IC1.23 U5.6 | length 306.7
  Top Layer w15: IC1.23@1349.53,945.16 1542.09,945.16 1558.54,928.7 U5.6@1558.54,837.87
NetIC1_24: IC1.24 U5.7 | length 342.5
  Top Layer w15: IC1.24@1349.53,964.84 1349.87,965.19 1550.81,965.19 1584.13,931.87 U5.7@1584.13,837.87
NetIC1_25: IC1.25 U5.8 | length 380.6
  Top Layer w15: IC1.25@1349.53,984.53 1564.98,984.53 1609.72,939.78 U5.8@1609.72,837.87
NetIC1_26: IC1.26 U5.9 | length 418.4
  Top Layer w15: IC1.26@1349.53,1004.21 1577.79,1004.21 1635.31,946.69 U5.9@1635.31,837.87
NetIC4_4: IC4.4 U4.31 | length 1574.4
  Top Layer w10: U4.31@4105,856.5 4160.26,856.5 v1(4176.01,872.24) ; v3(5278.74,900) IC4.4@5320.08,900 IC4.4@5320.75,899.33
  Bottom Layer w10: v1(4176.01,872.24) 4636.98,872.24 4682.23,917.49 4946.96,917.49 4960,904.45 4960,735.86 4970.86,725 5244,725 5255,736 5255,876.26 v3(5278.74,900)
NetIC7_4: IC7.4 U4.24 | length 1033.5
  Top Layer w10: v1(4080,705) 4080.2,705.2 4080.2,737.2 U4.24@4080.39,737.4 ; v1(4190,671.97) 4215,696.97 v1(4215,890) ; IC7.4@4760,981.14 4760,954.49 v3(4780,934.49)
  Bottom Layer w10: v1(4080,705) 4080,687 4095.03,671.97 v1(4190,671.97) ; v1(4215,890) 4370.2,890 4414.69,934.49 v3(4780,934.49)
NetJ1_A8: J1.A8 R16.1 | length 305.9
  Top Layer w10: J1.A8@675.54,742.13 676.45,741.22 695.33,741.22 706,730.55 706,668 714.55,659.45 840.47,659.45 872.36,691.34 R16.1@897.36,691.34
NetJ1_B8: J1.B8 R17.1 | length 626.8
  Top Layer w10: v3(574.36,586.34) 589.36,571.34 752.36,571.34 822.22,641.2 ; v3(575,801.36) 585.91,812.27 624.84,812.27 J1.B8@625,812.11 ; 822.09,641.34 R17.1@897.36,641.34
  Bottom Layer w10: v3(574.36,586.34) v3@574.36,800.27
NetJ3_2: J3.2 U5.19 | length 714.1
  Top Layer w10: v1(1456.18,1069.41) U5.19@1456.18,1070.16 ; J3.2@1889.76,983.11 1889.76,1010.35 v3(1905.51,1026.1)
  Bottom Layer w10: v1(1456.18,1069.41) 1456.18,1012.32 1486.83,981.68 1672.11,981.68 1818.9,1128.46 1874.02,1128.46 1905.51,1096.97 v3(1905.51,1026.1)
NetJ3_4: J3.4 U5.20 | length 610.7
  Top Layer w10: v1(1430.59,1069.41) U5.20@1430.59,1070.16 ; v3(1921.26,1000) 1922.07,1000 1938.96,983.11 J3.4@1939.76,983.11
  Bottom Layer w10: v1(1430.59,1069.41) 1430.59,1004.96 1468.5,967.05 1799.21,967.05 1832.17,1000 v3(1921.26,1000)
NetJ6_1: J6.1 R12.2 R35.1 U2.B3 | length 701.7
  Top Layer w10: R12.2@665,1117.64 665,1136 701,1172 J6.1@710,1172 751.67,1172 R35.1@772.38,1151.29 R35.1@771.99,1150.9 ; v3(800,980) 820,960 820,879.96 865.95,834.01 865.95,793.83 878.09,781.69 v3(917.36,781.69)
  Bottom Layer w10: v1(774,1152) 800,1126 v3(800,980) ; v3(917.36,781.69) 993.42,781.69 1001.73,790 v1(1001.73,801.38)
NetJ7_1: J7.1 R35.2 R36.1 U5.18 | length 3199.9
  Top Layer w10: v1(1447,1128.46) 1466.54,1128.46 1481.77,1113.23 1481.77,1080 U5.18@1481.77,1070.16
  Bottom Layer w10: v1(823.56,1151.29) 838.71,1151.29 937,1053 1106,1053 1225,1172 1403,1172 1446.54,1128.46 v1(1447,1128.46) ; v1(1482,1080) 1535,1080 1651.85,1196.85 3031.5,1196.85 3311.02,917.32 3311.02,808.98 J7.1@3390,730 3480.79,730 3499.41,748.62 v1(3499.41,802.56)
NetJ8_1: J8.1 R36.2 R53.1 U4.12 | length 803.7
  Top Layer w10: J8.1@3380,984.53 3445,919.53 3445,866.32 3473.45,837.87 3537.09,837.87 3550.59,824.37 R36.2@3550.59,802.56 ; R53.1@3845.59,858.11 3853.71,850 3865,850 v1(3890,825) U4.12@3945.55,825
  Bottom Layer w10: v1(3555.91,803.03) 3572.36,803.03 3663.02,893.7 3821.3,893.7 v1(3890,825)
NetJ9_1: J9.1 R11.2 R37.1 U2.B2 | length 527.8
  Top Layer w10: J9.1@744.92,1031.69 744.92,1076.33 760.59,1092 R11.2@762.64,1092 824.14,1092 v1(824.38,1092.24) ; v3(840,940) 840,892 885,847 v3(885,828.6)
  Bottom Layer w10: v1(824.38,1092.24) 824.38,957.24 840,941.62 v3(840,940) ; v3(885,828.6) 954.82,828.6 v1(982.05,801.38)
NetJ10_1: J10.1 R37.2 R38.1 U5.17 | length 3055.9
  Top Layer w10: v1(875,1064) 875,1091.68 R37.2@875.56,1092.24 ; U5.17@1507.36,1070.16 1507.36,1072.16 1508,1072.79 v1(1508,1106) ; v1(3440,751.97) 3453.04,738.93 R38.1@3499.41,738.93 R38.1@3496.2,742.14
  Bottom Layer w10: v1@877,1061 900,1038 1121,1038 1240,1157 1386,1157 1437,1106 v1(1508,1106) 1537,1106 1643.55,1212.55 1687.25,1212.56 1689.7,1215.01 3048.77,1215.01 3336.07,927.7 3336.07,871.05 J10.1@3390,817.13 3421.82,785.31 3421.82,770.15 v1(3440,751.97)
NetJ11_1: J11.1 R38.2 R52.1 U4.13 | length 789.6
  Top Layer w10: J11.1@3400,892.6 3400,880 3455,825 3455,773.28 3460.86,767.43 3545.47,767.43 3550.59,762.31 R38.2@3550.59,738.93 ; R52.1@3845.59,788.11 3880.16,788.11 3901.3,809.25 U4.13@3945.55,809.25
  Bottom Layer w10: v1(3555,739.82) 3693.13,877.95 3811.02,877.95 3845,843.98 v1(3845,790)
NetJ13_1: J13.1 R39.2 U5.10 | length 1110.1
  Top Layer w10: v1(1315,845) v1(1384,845)
  Bottom Layer w10: v1(877.95,1027.83) 895.79,1010 1081,1010 1246,845 v1(1315,845) ; J13.1@1384,616 v1(1384,845) 1443,845 1474,814 1638,814 v1(1661,837)
NetJ14_1: J14.1 R29.2 U5.11 | length 576.1
  Top Layer w15: v1(1660.19,897) 1660.19,897.27 1660.91,897.99 U5.11@1660.91,1070.16 ; v1(1753.94,708.66) 1799.34,708.66 1825,683 J14.1@1825,589.21
  Bottom Layer w15: v1(1660.19,897) 1688,869.19 1688,774.6 v1(1753.94,708.66)
NetR13_1: R13.1 R39.1 U2.A1 | length 472.6
  Top Layer w10: R13.1@662.64,1022.42 687.38,1022.42 724.8,985 765,985 802.4,1022.4 823.07,1022.4 823.07,991.73 890.8,924 928.53,924 962.36,890.17 U2.A1@962.36,821.06
NetR14_1: R14.1 R16.2 U2.E6 | length 160.9
  Top Layer w10: R16.2@937.88,696.1 R16.2@942.64,691.34 R14.1@1000.95,691.34 1000.95,706.02 1017.36,722.44 1051.73,722.44 1060.79,731.5 U2.E6@1060.79,742.32
NetR14_2: R14.2 R15.2 U2.D5 | length 122.9
  Top Layer w10: R15.2@1045.28,641.34 1045.75,641.81 1045.75,690.87 v1(1046.22,691.34)
  Bottom Layer w10: v1(1041.1,761.69) 1041.1,729.07 1046.22,723.96 v1(1046.22,691.34)
NetR15_1: R15.1 R17.2 U2.B4 | length 232.4
  Top Layer w10: R17.2@942.64,641.34 R15.1@1000,641.34 1001.73,643.07 v1(1001.73,640)
  Bottom Layer w10: v1(1001.73,640) 1001.73,769.42 1021.42,789.11 v1(1021.42,801.38)
NetR19_1: R19.1 R21.2 U3.3 | length 121.7
  Top Layer w20: R19.1@2215,549.13 2215.37,549.51 2264.63,549.51 R21.2@2265,549.88 2278.25,536.63 U3.3@2330.87,536.63
NetR24_2: R24.2 R28.2 U5.1 | length 118.2
  Top Layer w10: R24.2@1379.73,772.05 1378.94,771.26 R28.2@1427.91,771.26 ; R28.2@1426.93,771.26 R28.2@1429.11,773.44 ; U5.1@1429.11,836.4 U5.1@1430.59,837.87 ; R28.2@1430.1,773.44 U5.1@1430.1,836.4
NetR31_1: R31.1 U2.D1 | length 181.8
  Top Layer w10: v3(927.36,736.34) 952.99,761.96 962.32,761.96 U2.D1@962.36,762.01
  Bottom Layer w10: v1(811.64,687) 813.99,687 863.32,736.34 v3(927.36,736.34)
NetR32_1: R32.1 U2.D2 | length 204.2
  Bottom Layer w10: v1@785.21,779.79 802.99,762.01 v1(982.05,762.01)
  other v1: 780.16,785.36
NetR50_1: R50.1 U4.5 | length 137.1
  Top Layer w10: R50.1@3935.52,972.52 3960.41,947.63 4007.37,947.63 4017.4,937.6 U4.5@4017.4,896.85
NetR51_1: R51.1 U4.4 | length 104.1
  Top Layer w10: R51.1@4000.52,973.11 4025.04,973.11 4033.15,965 U4.4@4033.15,896.85
NetR54_1: R54.1 U4.11 | length 157.1
  Top Layer w10: R54.1@3845.59,928.11 3855.6,918.11 3869.05,918.11 3878.38,908.78 3878.38,873.01 3910.64,840.75 U4.11@3945.55,840.75
NetR57_2: R57.2 R58.1 U4.18 | length 726.8
  Top Layer w10: R58.1@3600.39,1019.68 3608.54,1027.83 3751.97,1027.83 3760,1019.8 ; v1(3760,790) 3760,1019.8 ; R57.2@3791.97,1023.97 3787.79,1019.8 3760,1019.8 ; v1(3953.1,696.97) 3972.44,696.97 3985.91,710.44 U4.18@3985.91,737.4
  Bottom Layer w10: v1(3760,790) 3853.03,696.97 v1(3953.1,696.97)
NetR60_1: R60.1 R61.1 U4.14 | length 273.7
  Top Layer w10: R60.1@3706.18,725.72 3759.73,725.72 R61.1@3770,715.45 ; R61.1@3770,720.86 3834.04,720.86 3906.69,793.5 U4.14@3945.55,793.5
NetR61_2: R61.2 R62.2 U4.15 | length 302.3
  Top Layer w10: R62.2@3705.59,655.72 3714.14,664.27 R61.2@3770,664.27 ; R61.2@3770,669.68 3793.94,669.68 3800,675.74 3800,699.68 3807.18,706.86 3839.84,706.86 3910.74,777.76 U4.15@3945.55,777.76
NetR65_2: R65.2 U4.10 | length 373.9
  Top Layer w10: v1(3915,860.43) 3929.22,860.43 3933.16,856.5 U4.10@3945.55,856.5
  Bottom Layer w10: v1(3600.59,892.6) 3617.44,909.45 3846.46,909.45 3895.47,860.43 v1(3915,860.43)
NetR70_1: R70.1 U4.20 | length 111.6
  Top Layer w10: U4.20@4017.4,737.4 4017.4,696.02 4033.15,680.28 4033.15,666.12 4038.68,660.59 R70.1@4060.48,660.59 ; R70.1@4052.05,669.02 R70.1@4055,671.97
NetR71_1: R71.1 U4.19 | length 81.7
  Top Layer w10: R71.1@4001.65,655.72 U4.19@4001.65,737.4
pads on no net: IC1.10 IC1.11 IC1.12 IC1.16 IC1.17 IC1.20 IC1.21 IC1.22 IC1.27 IC1.28 J1.A2 J1.A3 J1.A10 J1.A11 J1.B2 J1.B3 J1.B10 J1.B11 J3. J3.6 U2.C2 U2.C3 U2.C4 U2.D3 U2.E3 U2.E4 U2.E5 U3.4 U4.21 U5.2 U5.3

## Polygon pours and split planes (outlines as drawn)
GND on Bottom Layer "GND_L02_P028" (solid, remove dead copper, pour order 28): 326.3,1342.52 326.3,319.25 6084.65,319.25 6084.65,1342.52
NetC34_2 on Bottom Layer "NETC34_2_L02_P022" (solid, pour order 22): 4165,626.57 4165,557.76 4222.87,557.76 4222.87,626.57
GND on Bottom Layer "GND_L02_P024" (solid, pour order 24): 3961.88,880 3961.88,753.66 4088.2,753.66 4088.2,880
NetC58_2 on Bottom Layer "NETC58_2_L02_P016" (solid, pour order 16): 5075,915 5075,737.44 5240,737.44 5240,915
NetC34_2 on Bottom Layer "NETC34_2_L02_P018" (solid, pour order 18): 4750,768.11 4927.56,768.11 4927.56,909.63 4750,909.63
NetC61_2 on Bottom Layer "NETC61_2_L02_P020" (solid, pour order 20): 5050,1002 5227.56,1002 5227.56,1143.52 5050,1143.52
NetC60_2 on Bottom Layer "NETC60_2_L02_P002" (solid, pour order 2): 5105,650 5105,472.44 5250,472.44 5250,650
GND on Bottom Layer "GND_L02_P026" (solid, pour order 26): 1191.88,1049 1191.88,927.28 1318.2,927.28 1318.2,1049

## Keep-outs
Keep-Out Layer:
  lines w19.68: 964.57,1259.84 433.07,1259.84 ccw(c433.07,1220.47) 393.7,1220.47 393.7,433.07 ccw(c433.07,433.07) 433.07,393.7 964.57,393.7 ccw(c964.57,413.39) 984.25,413.39 ; 964.57,1260 cw(c964.57,1240.31) 984.25,1240.31 ; 984.25,414.15 984.25,473.21 ; 984.25,472.44 cw(c1003.94,472.44) 1003.94,492.13 1023.62,492.13 cw(c1023.62,472.44) 1043.31,472.44 ; 984.25,1180.49 984.25,1239.55 ; 984.25,1181.26 ccw(c1003.94,1181.26) 1003.94,1161.57 1023.62,1161.57 ccw(c1023.62,1181.26) 1043.31,1181.26 ; 1043.31,413.26 1043.31,472.67 ; 1043.31,413.39 ccw(c1062.99,413.39) 1062.99,393.7 5421.26,393.7 ccw(c5421.26,413.39) 5440.94,413.39 5440.94,472.44 cw(c5460.63,472.44) 5460.63,492.13 5480.31,492.13 ; 1043.31,1181.03 1043.31,1240.44 ; 1043.31,1240.31 cw(c1062.99,1240.31) 1062.99,1260 5421.26,1260 cw(c5421.26,1240.32) 5440.94,1240.32 ; 5440.94,1180.87 5440.94,1239.92 ; 5440.94,1181.26 ccw(c5460.63,1181.26) 5460.63,1161.57 5480.31,1161.57 ; 5480.31,492 cw(c5480.31,472.32) 5500,472.32 5500,413.26 ccw(c5519.69,413.26) 5519.69,393.58 ; 5480.31,1161.7 ccw(c5480.31,1181.38) 5500,1181.38 5500,1240.44 cw(c5519.69,1240.44) 5519.69,1260.12 ; 5519.69,393.7 5964.57,393.7 ccw(c5964.57,433.07) 6003.94,433.07 6003.94,1220.47 ccw(c5964.57,1220.47) 5964.57,1259.84 ; 5519.69,1260 5964.57,1260

## Silkscreen, mask and mechanical layers (free items; w line width, h text height)
Top Overlay:
  drawing of 16 lines, arcs and shapes, not listed
  text "SDA" at 663,1212.57 h30
  text "VOLTA P1" at 3080,1100.04 h60
  text "3V3" at 3000,1059.06 h30
  text "GND" at 3115,1057.79 h30
  text "SCL" at 712,959 h30
  text "3" at 3177.17,958.11 h30
  text "SDA" at 3350,945 h30 r90
  text "SCL" at 3350,872.24 h30 r90
  text "SCL" at 3350,787.43 h30 r90
  text "SDA" at 3350,690 h30 r90
  text "1" at 3188.98,671.25 h30
  text "INT" at 1349,543 h30
  text "VSYS" at 2066.93,511.81 h30 r90
  text "GND" at 1645,485 h30
  text "+VE" at 1785,485 h30
  text "3V3" at 1925,485 h30
  text "BATT" at 3039.37,468.5 h30
  text "BATT" at 3523.62,464.57 h30
  text "PIEZO" at 1690,433.43 h30
  text "GND" at 3051.18,421.26 h30
  text "+VE" at 3537.09,417.32 h30